# Altium PCB 功率检测模块.PcbDoc
Units mil, origin at the board's own origin, x right, y up, seen from the top; angles counter-clockwise.
Board outline 2830 x 2245 mil, 2 copper layers (Top Layer, Bottom Layer); 41 components, 28 nets, 158 pads, 114 vias.
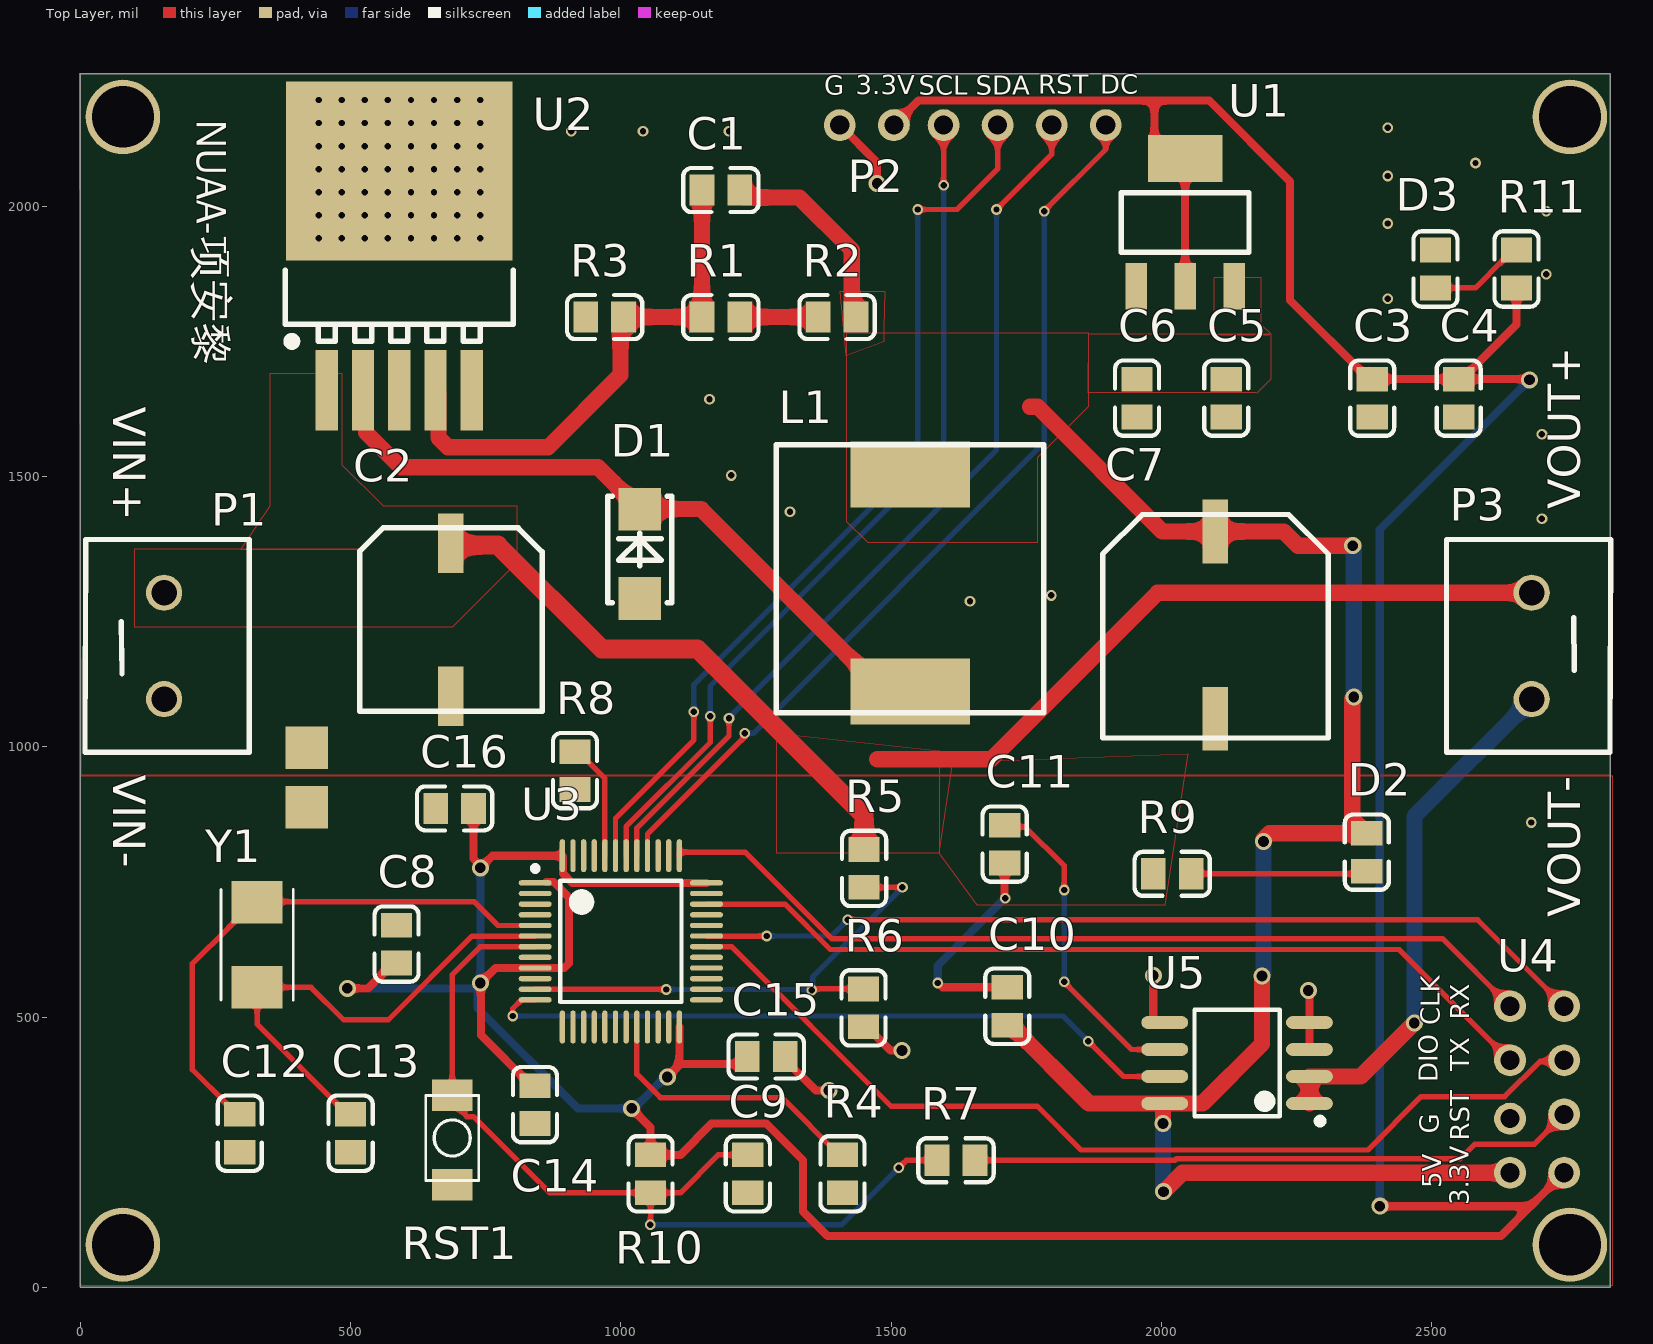
[diagram p0: Top Layer view]
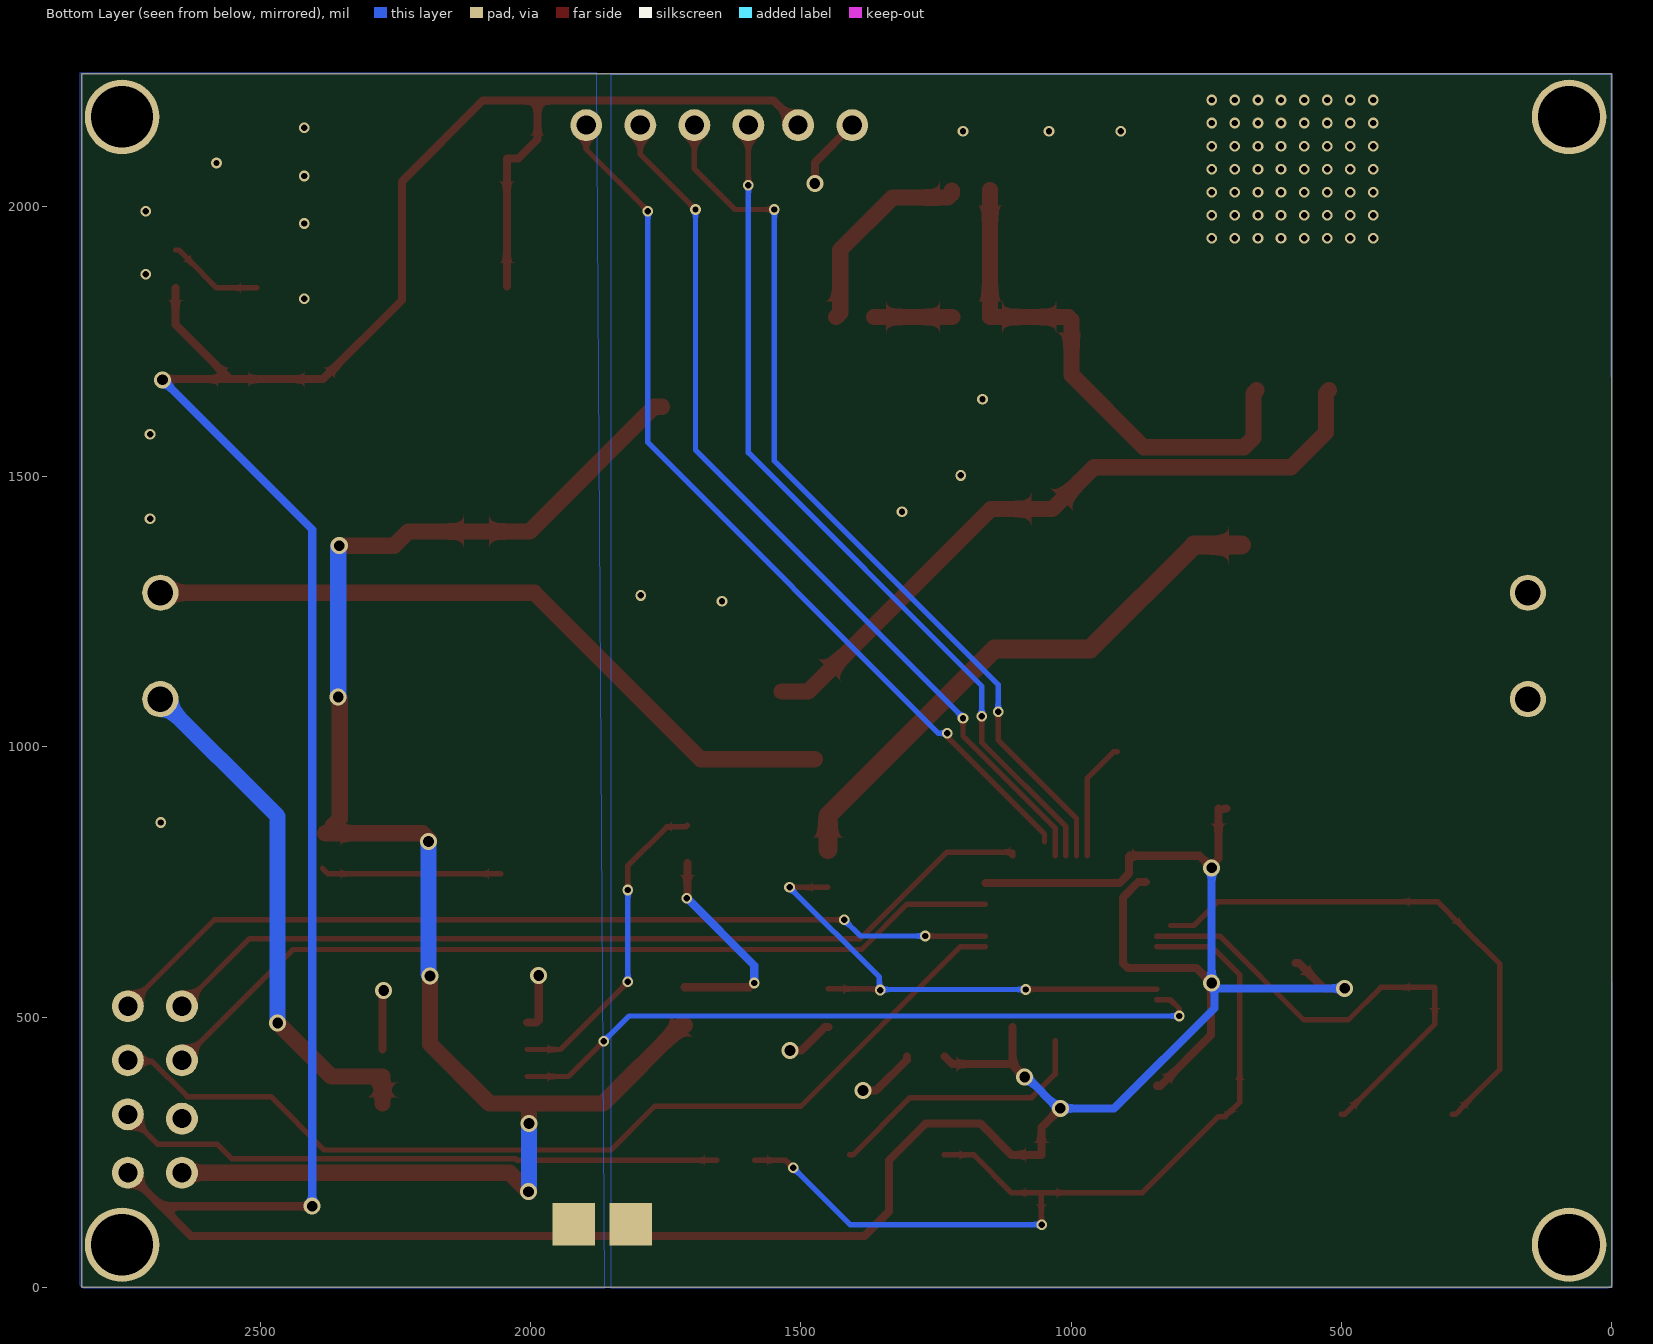
[diagram p1: Bottom Layer view, seen from below]
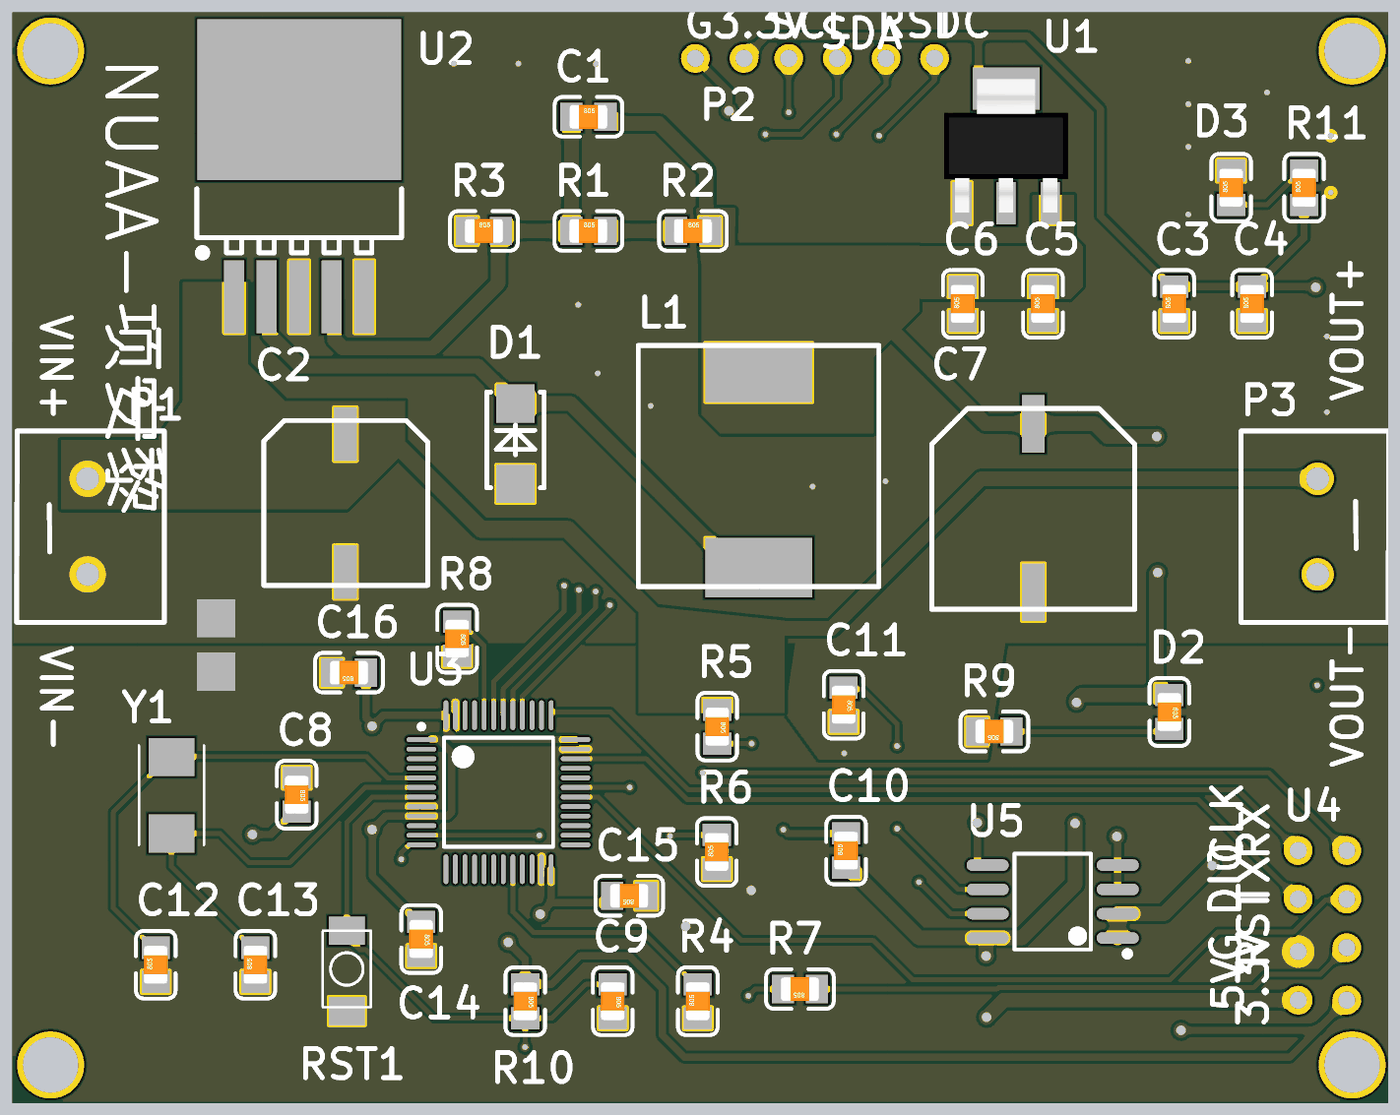
[diagram p2: 3D render of the assembled board from above, using the file's embedded part models]

## Layer stack, top to bottom
Top Solder: solder mask 0.4, Solder Resist, Dk 3.5
Top Layer: signal copper 1.4
Dielectric 1: dielectric 12.6, FR-4, Dk 4.8
Bottom Layer: signal copper 1.4
Bottom Solder: solder mask 0.4, Solder Resist, Dk 3.5

## Board outline
0,0 0,2245 2830,2245 2830,0

## Design rules (kind name [scope] priority, off if disabled: settings)
Clearance [All] p1: gap=6 ignorepadtopadclearanceinfootprint=FALSE except(0: Arc-Hole Track-Hole SMDPad-Hole THPad-Hole Via-Hole Fill-Hole Poly-Hole Region-Hole Text-Hole)
PolygonConnect [All] p1: connectstyle=Direct reliefconductorwidth=10 reliefentries=4 polygonreliefangle="90 Angle" airgapwidth=10
RoutingVias [All] p1: holewidth=28 width=50 viastyle="Through Hole" minholewidth=28 minwidth=50 maxholewidth=28 maxwidth=50
SolderMaskExpansion [All] p1: expansion=4 istentingtop=FALSE
Width [All] p1: maxlimit=35 minlimit=8 preferedwidth=10 minimp=50.000000 maximp=50.000000 favimp=50.000000
30 further rules are at their usual default settings.

## Components (designator, comment, footprint, x,y, rotation, side; value= is the part's Value field where it differs from the comment)
C1 "3.3nF" 0805 1185.04,2030 r0 top
C2 "100uF" 电解电容8*10.5 685,1235 r270 top
C3 "10uF" 0805 2390,1645.04 r90 top
C4 "0.1uF" 0805 2550,1645.04 r90 top
C5 "10uF" 0805 2120,1645.04 r90 top
C6 "0.1uF" 0805 1955,1645.04 r90 top
C7 "220uF" 电解电容10*10.5 2100,1225 r270 top
C8 "0.1uF" 0805 585,635 r270 top
C9 "0.1uF" 0805 1235,209.96 r270 top
C10 "0.1uF" 0805 1715,520 r90 top
C11 "1nF" 0805 1710,820 r270 top
C12 "22pF" 0805 295,285 r90 top
C13 "22pF" 0805 500,285 r90 top
C14 "0.1uF" 0805 841,337.96 r270 top
C15 "0.1uF" 0805 1268.96,427 r180 top
C16 "0.1uF" 0805 692.46,886 r180 top
D1 "1N5822" SMA(DO-214AC)_S2 1035,1365 r270 top
D2 "LED" 0805 2380,805.04 r270 top
D3 "LED" 0805 2507,1883.96 r90 top
L1 "470uH" 电感 1535.43,1311.09 r180 top
P1 "接线端子" 接线端子 155,1186.57 r270 top
P2 "OLED" HDR6 1397.06,2150 r0 top
P3 "接线端子" 接线端子 2685,1186.57 r90 top
R1 "12K" 0805 1185,1795 r0 top
R2 "43K" 0805 1400,1795 r0 top
R3 "18K" 0805 969.96,1795 r0 top
R4 "10K" 0805 1410,209.96 r90 top
R5 "75K" 0805 1450,774.96 r270 top
R6 "7K5" 0805 1449,516.96 r90 top
R7 "1.5K" 0805 1620.04,235 r180 top
R8 "10K" 0805 915,955.96 r270 top
R9 "10K" 0805 2019.96,765 r180 top
R10 "10K" 0805 1055,209.96 r270 top
R11 "3.9K" 0805 2657,1883.96 r90 top
RST1 "按键" SWT3*4 688,276.26 r270 top
U1 "AMS1117_3.3" SOT-223 2044,1970 r270 top
U2 "LM2596S-ADJ" TO-263-5 590,1659.49 r270 top
U3 "STM32F103C8T6" STM-LQFP48_L 1000,640 r0 top
U4 "SWD&USART" HDR2X4 2645,520 r270 top
U5 "ACS712-5A" SOP-8_208mil 2140,415 r90 top
Y1 "晶振" 5032_2P 327.2,633.74 r270 top

## Footprints (in the part's own frame and the unit in brackets; to place one, negate y for a bottom-side part, rotate by r counter-clockwise, add the part's x,y. Pads: shape width x height; smd on the part's side, far side on the other; paste and mask are expansions set on the pad)
0805 [mm]
  rect 1.16x1.47 smd: 1(-0.89,0) 2(0.89,0)
  silkscreen extent -1.77,-1.04 1.77,1.04, body extent -1,-0.62 1,0.63, height 0.77
5032_2P [mm]
  rect 2x2.4 smd: 1(-2,0) 2(2,0)
  silkscreen extent -2.6,-1.7 2.6,1.7
HDR2X4 [mm]
  round 1.5 hole 0.9: 1(0,0) 2(2.54,0) 3(5.282,0) 4(7.822,0) 5(0,2.54) 6(2.54,2.54) 7(5.08,2.54) 8(7.822,2.54)
HDR6 [mm]
  round 1.5 hole 0.9: 1(0.202,0) 2(2.742,0) 3(5.08,0) 4(7.62,0) 5(10.16,0) 6(12.7,0)
SMA(DO-214AC)_S2 [mm]
  rect 2x2 smd: 1(2.302,0) 2(-1.898,0)
  silkscreen extent -2.5,-1.5 2.5,1.5
SOP-8_208mil [mm]
  oval 0.6x2.2 smd: 1(-1.905,-3.4) 2(-0.635,-3.4) 3(0.635,-3.4) 4(1.905,-3.4) 5(1.905,3.4) 6(0.635,3.4) 7(-0.635,3.4) 8(-1.905,3.4)
  silkscreen extent -2.88,-4.05 2.5,2
SOT-223 [mm]
  rect 2.2x1 smd: 1(3,-2.3) 2(3,0) 3(3,2.3)
  rect 2.2x3.5 smd: 2(-3,0)
  silkscreen extent -1.4,-3 1.4,3, body extent -3.49,-3.24 3.49,3.24, height 1.64
STM-LQFP48_L [mm] "QFP, 48-Leads, Body 7x7mm, Pitch 0.5mm, IPC High Density"
  oval 1.55x0.25 smd: 1(-4.025,2.75) 2(-4.025,2.25) 3(-4.025,1.75) 4(-4.025,1.25) 5(-4.025,0.75) 6(-4.025,0.25) 7(-4.025,-0.25) 8(-4.025,-0.75) 9(-4.025,-1.25) 10(-4.025,-1.75) 11(-4.025,-2.25) 12(-4.025,-2.75) 25(4.025,-2.75) 26(4.025,-2.25) 27(4.025,-1.75) 28(4.025,-1.25) 29(4.025,-0.75) 30(4.025,-0.25) 31(4.025,0.25) 32(4.025,0.75) 33(4.025,1.25) 34(4.025,1.75) 35(4.025,2.25) 36(4.025,2.75)
  oval 0.25x1.55 smd: 13(-2.75,-4.025) 14(-2.25,-4.025) 15(-1.75,-4.025) 16(-1.25,-4.025) 17(-0.75,-4.025) 18(-0.25,-4.025) 19(0.25,-4.025) 20(0.75,-4.025) 21(1.25,-4.025) 22(1.75,-4.025) 23(2.25,-4.025) 24(2.75,-4.025) 37(2.75,4.025) 38(2.25,4.025) 39(1.75,4.025) 40(1.25,4.025) 41(0.75,4.025) 42(0.25,4.025) 43(-0.25,4.025) 44(-0.75,4.025) 45(-1.25,4.025) 46(-1.75,4.025) 47(-2.25,4.025) 48(-2.75,4.025)
  silkscreen extent -4.15,-2.85 2.85,3.55, body extent -3.5,-3.5 3.5,3.5, height 1.6
SWT3*4 [mm]
  rect 1.48x1.9 smd: 1(-2,0) 2(2.202,0)
  silkscreen extent -2,-1.25 2,1.25
TO-263-5 [mm]
  rect 8.4x10.65 smd: 0(-10.3,0)
  rect 3.8x1.05 smd: 1(0,-3.4) 2(0,-1.7) 3(0,0) 4(0,1.7) 5(0,3.4)
  silkscreen extent -5.65,-5.35 -2.1,5.35
接线端子 [mm]
  round 1.7 hole 1.2: 1(-2.5,0) 2(2.5,0)
  silkscreen extent -5,-3.72 5,4
电感 [mm]
  rect 5.6x3.1 smd: 1(0,5.302) 2(0,-4.898)
  silkscreen extent -6.28,-6.3 6.3,6.3
电解电容8*10.5 [mm]
  rect 2.8x1.2 smd: 1(-3.6,0) 2(3.6,0)
  silkscreen extent -4.32,-4.26 4.3,4.3
电解电容10*10.5 [mm]
  rect 3x1.2 smd: 1(-4.4,0) 2(4.4,0)
  silkscreen extent -5.2,-5.3 5.3,5.3

## Part data
C1 C3 C4 C5 C6 C8 C9 C10 C11 C12 C13 C14 C15 C16: library part 电容, "电容"
C2 C7: library part 电解电容
L1: library part 电感
P1 P3: "螺旋式接线端子"
R1 R2 R3 R4 R5 R6 R7 R8 R9 R10 R11: library part RES, "贴片电阻"
U3: "ARM Cortex-M3 32-bit MCU, 64 KB Flash, 20 KB Internal RAM, 37 I/Os, 48-pin LQFP, -40 to 85 degC, Tray", I/Os (High Current)=37, Operating Frequency(F) (Processor speed) (MHz)=72, Supplier Part Number 1=497-6063-ND, Supply Voltage(Vcc) min (V)=2, A/D Converter="2x12-bit (10 Channel)", ComponentLink1Description="Manufacturer URL", ComponentLink1URL=http://www.st.com/web/en/home.html, ComponentLink2Description=Datasheet, ComponentLink2URL=http://www.st.com/st-web-ui/static/active/en/resource/technical/document/datasheet/CD00161566.pdf, ComponentLink3Description="Package Specification", ComponentLink3URL=http://www.st.com/st-web-ui/static/active/en/resource/technical/document/datasheet/DM00058181.pdf, Core="ARM Cortex-M3", DatasheetVersion="Rev. 16", FLASH Size (Prog) (kB)=64, Internal RAM Size (kB)=20, Mounting Technology="Surface Mount", PackageDescription="48-Pin Low Profile Quad Flat Package, 7 x 7 mm Body, 0.5 mm Pitch", PackageReference=LQFP48, PackageVersion="Rev. 6, 06/2013", Packing=Tray, PartNumber=STM32F103C8T6, Supplier 1=Digi-Key, Supplier 2=Farnell, Supplier 3=Newark, Supplier 4=Newark, Supplier 5=Mouser, Supplier Part Number 2=1447637, Supplier Part Number 3=59M2182, Supplier Part Number 4=57P1222, Supplier Part Number 5=511-STM32F103C8T6

## Free pads (board coordinates)
  round 137.8 hole 114.17: ""(78.74,78.74) ""(78.74,2165.35) ""(2755.91,78.74) ""(2755.91,2165.35)
  rect 78.74x78.74 smd mask+0: ""(419,888) ""(419,998)
  rect 78.74x78.74 smd far side mask+0: ""(1815,117) ""(1920,117)

## Via types
v1: diameter 19.68, hole 11.81, Top Layer to Bottom Layer, 58 vias
v2: diameter 19.68, hole 11.81, Top Layer to Bottom Layer, tented both sides, 31 vias
v3: diameter 31.5, hole 19.68, Top Layer to Bottom Layer, tented both sides, 19 vias
v4: diameter 19.68/19.68 (per signal layer), hole 11.81, Top Layer to Bottom Layer, tented both sides, 6 vias

## Nets (pads, with @x,y where several pads share a name; then routed paths per layer and width w, separated by ;. In a path a pad name is that pad's centre, name@x,y a point inside that pad or via, vN(x,y) a via of type N, cw(c..) or ccw(c..) an arc to the next point about the centre after c; other vN are vias at no path point)
3.3V: C3.2 C4.2 C8.2 C14.1 C15.2 C16.1 P2.2 R10.1 R11.1 U1.2 U3.1 U3.9 U3.24 U3.36 U3.48 U4.8 | length 8551.2
  Top Layer w15: v3(494,553) 531.94,553 578.9,599.96 C8.2 ; C16.1@712.5,886 726.86,882.98 C16.1@727.5,882.84 ; C16.1 C16.1@727.5,882.84 ; C14.1 834.9,373 741,466.9 741,562 v3(740,563) 767.79,590.79 895.21,590.79 904,599.57 904,721.3 875.79,749.5 U3.1@862.05,749.5 ; v3(1020,331) 1055,296 R10.1 1110,245 1168,303 1269,303 1337,235 1337,140 1382,95 2627.94,95 2682.94,150 ; v3(1086,389) 1108.27,411.27 ; U3.24 1108.27,411.27 ; U3.36 909.97,748.27 893,765.24 893,797.2 U3.48 762.46,798.46 v3(740,776) 740,780.46 727.5,792.96 C16.1@727.5,882.84 ; C15.2 1219.92,413 1110,413 1108.27,411.27 ; P2.2 1550.53,2195.53 1987,2195.53 ; U1.2@2044,1851.89 2044,2088.11 2022.81,2088.11 1987,2123.92 1987,2195.53 ; v3(2404,150) 2682.94,150 ; R11.1 2657,1780.98 C4.2@2556.1,1680.08 ; v3(2681,1679) 2679.92,1680.08 C4.2@2556.1,1680.08 ; U4.8 2682.94,150 ; 1987,2195.53 2088.47,2195.53 2237.94,2046.06 2237.94,1826.04 2383.9,1680.08 C3.2 C4.2 C4.2@2556.1,1680.08
  Bottom Layer w15: v3(494,553) 726.89,553 736.89,563 v3(740,563) ; v3(740,776) v3(740,563) ; v3(1086,389) 1082,389 1024,331 v3(1020,331) 920.36,331 735,516.36 735,546.34 736.84,548.18 736.84,559.84 v3(740,563) ; v3(2404,150) 2404,1402 v3(2681,1679)
+5: C1.2 C5.2 C6.2 C7.1 C10.1 D2.1 L1.2 R2.2 U1.3 U4.4 U5.8 | length 3599.9
  Top Layer w10: C1.2 C1.2@1220.82,2029.26
  Top Layer w30: C1.2@1220.82,2029.26 1220.82,2023.15 1227.91,2016.06 1330.39,2016.06 1427.2,1919.25 1427.2,1802.83 R2.2 ; C10.1 1721.1,484.96 1866.06,340 U5.8 ; 1757,1629 1771,1629 2001.77,1398.23 C7.1 2226.43,1398.23 2252.66,1372 v3(2354,1372) ; v3(2003,303) 2003,336.86 U5.8 ; v3(2004,177) 2039.06,212.06 U4.4 ; v3(2186,576) 2186,450 2076,340 U5.8 ; v3@2188,828 2200.08,840.08 D2.1@2373.9,840.08 ; v3(2356,1092) 2353,1089 2353,867.08 2366.06,854.02 2366.06,847.91 D2.1@2373.9,840.08 ; D2.1 D2.1@2373.9,840.08
  Bottom Layer w30: v3(2003,303) 2003,178.4 2004,177.4 v3(2004,177) ; v3(2186,576) 2186,576.4 2188.97,579.37 v3(2188.97,824.7) ; v3(2354,1372) 2354,1371.6 2356,1369.6 v3(2356,1092)
ADC1_IN1: R5.2 R6.2 U3.11 | length 940.2
  Top Layer w10: U3.11 1083.58,551.42 v2(1084,551) ; v2(1353,549.92) 1355.08,552 R6.2 ; R5.2 v2(1520.92,739.92) v2@1521,740
  Bottom Layer w10: v2(1084,551) v2@1354.08,551 ; v2(1353,549.92) v2@1354.08,551 ; v2(1520.92,739.92) 1354.85,573.85 1354.85,551.77 v2@1354.08,551
ADC2_IN2: U3.12 U5.7 | length 1314.4
  Top Layer w10: v4(800,502) 800,515.63 816.1,531.73 U3.12 ; v4(1865,455) 1930,390 U5.7
  Bottom Layer w10: v4(800,502) 1818,502 v4(1865,455)
BOOT1: R4.2 U3.20 | length 504
  Top Layer w10: U3.20@1029.45,456.02 1029.45,394.55 1073,351 1297.9,351 1403.9,245 R4.2
GND: C8.1 C9.2 C12.1 C13.1 C14.2 C15.1 C16.2 P2.1 pad.@419,888 pad.@1815,117 R4.1 R6.1 R8.2 RST1.2 U3.8 U3.23 U3.35 U3.47 U4.3 | length 336.4
  Top Layer w15: C15.1 1304,420.9 1360.9,364 v3(1385,364) ; P2.1 1474,2081 v3(1474,2042) ; R6.1 1455.1,481.92 1499.02,438 v3(1520,438)
GND-A: C2.2 C3.1 C4.1 C5.1 C6.1 C7.2 C10.2 C11.2 D1.1 D3.2 P1.2 pad.@419,998 pad.@1920,117 R3.1 R9.2 U1.1 U2.3 U2.5 U5.3 U5.4 U5.5 | length 622
  Top Layer w15: v2(1586,563) 1587.27,563 1595.23,555.04 C10.2 ; C11.2 1710,721 v2(1711,720) ; v3(1985,577) 1985,493.98 1988.98,490 U5.5 ; v3(2272,549) 2273.86,547.14 U5.4 U5.3
  Bottom Layer w15: v2(1586,563) 1586.34,563.34 1586.34,595.34 v2(1711,720)
  other v1: 2712,1874 2712,1991
  other v2: 2684,860 1646,1269 1796,1280 2704,1422 1313,1435 1204,1502 2704,1578 1164,1643 2419,1829 2419,1968 2419,2056 2581,2080.04 908,2139 1041,2139 1200,2138.53 2419,2145
NetC1_1: C1.1 R1.1 R3.2 U2.4 | length 979.1
  Top Layer w30: U2.4 662.6,1653.82 662.6,1571.57 680.17,1554 865.37,1554 999.33,1687.96 999.33,1789.33 R3.2 R1.1 ; R1.1 C1.1
NetC11_1: C11.1 U5.6 | length 594
  Top Layer w10: C11.1 1713.12,851.92 1748.08,851.92 1820,780 v4(1820,735) ; v4(1820,565) 1945,440 U5.6
  Bottom Layer w10: v4(1820,565) v4(1820,735)
NetC12_2: C12.2 U3.5 Y1.1 | length 992.9
  Top Layer w10: C12.2 288.9,320.04 271.06,337.87 271.06,338.85 207.42,402.49 207.42,598.69 274.81,666.09 322.18,713.45 328.18,713.45 728.42,713.45 772.42,669.45 U3.5@816.02,669.45
NetC13_2: C13.2 U3.6 Y1.2 | length 913.4
  Top Layer w10: C13.2 493.9,320.04 367,446.94 367,447 327.2,486.8 Y1.2 427,555 487,495 570,495 724.84,649.84 U3.6
NetD1_2: D1.2 L1.1 U2.2 | length 1285.6
  Top Layer w30: U2.2 528.74,1653.82 528.74,1581.26 593,1517 957.74,1517 D1.2 1148.84,1439.74 1486.22,1102.36 L1.1
NetD2_2: D2.2 R9.1 | length 334.1
  Top Layer w10: R9.1 2375,765 D2.2@2385,775
NetD3_1: D3.1 R11.2 | length 179.1
  Top Layer w10: D3.1 2507.08,1849 2581,1849 2633.06,1901.06 2633.06,1901.17 2650.9,1919 R11.2
NetR1_2: R1.2 R2.1 | length 144.9
  Top Layer w30: R1.2 R2.1
NetR7_1: R7.1 U4.7 | length 1125.1
  Top Layer w10: R7.1 2025.23,235 2028.29,238.06 2553.06,238.06 2580,265 2690,265 U4.7
NetR8_1: R8.1 U3.44 | length 219.1
  Top Layer w10: R8.1 921.1,991 970.47,941.63 U3.44
OLED_DC: P2.6 U3.40 | length 1686.6
  Top Layer w10: U3.40@1049.29,823.98 1049.29,838.29 1227.15,1016.15 1227.15,1023.15 v2(1229,1025) ; v2(1783,1991) 1897.06,2105.06 P2.6
  Bottom Layer w10: v2(1229,1025) 1245,1025 1783,1563 v2(1783,1991)
OLED_RST: P2.5 U3.41 | length 1669.5
  Top Layer w10: U3.41 1029.53,849.42 1200,1019.89 v2(1200,1053) ; v2(1695,1994) 1797.06,2096.06 P2.5
  Bottom Layer w10: v2(1200,1053) 1200,1054 1695,1549 v2(1695,1994)
OLED_SCL: P2.3 U3.42 | length 1594.8
  Top Layer w10: U3.42 1009.84,852.36 1165.35,1007.87 v2(1165.35,1056.46) ; v2(1597.06,2039.06) P2.3
  Bottom Layer w10: v2(1165.35,1056.46) 1165.35,1112.35 1597.06,1544.06 v2(1597.06,2039.06)
OLED_SDA: P2.4 U3.43 | length 1687.1
  Top Layer w10: U3.43 990.16,867.7 1135,1012.54 v2(1135,1065) ; v2(1549,1994) 1622,1994 1697.06,2069.06 P2.4
  Bottom Layer w10: v2(1135,1065) 1135,1115 1549,1529 v2(1549,1994)
RST: C9.1 R7.2 R10.2 RST1.1 U3.7 | length 1693.5
  Top Layer w10: U3.7 740.16,630.16 688,578 RST1.1 688,342.74 715.13,315.61 727.39,315.61 868,175 R10.2@1055,175 ; v2@1054,115 1055,116 R10.2 1109.92,174.92 1180,245 C9.1 ; v2(1514,221) 1528,235 R7.2
  Bottom Layer w10: v2@1057,116 1409,116 v2(1514,221)
  other v2: 1054.5,115.5
SWCLK_PA14: U3.37 U4.1 | length 1661.3
  Top Layer w10: U3.37 1108.27,804.92 1108.35,805 1230,805 1390,645 2520,645 U4.1
SWDIO_PA13: U3.34 U4.2 | length 1606.2
  Top Layer w10: U3.34 1303.47,708.9 1387.37,625 2440,625 U4.2
USART1-RX: U3.31 U4.5 | length 1665.3
  Top Layer w10: U3.31 1269.84,649.84 v4(1270,650) ; v4(1420,680) 2585,680 U4.5
  Bottom Layer w10: v4(1270,650) 1390,650 v4(1420,680)
USART1-TX: U3.30 U4.6 | length 1811.1
  Top Layer w10: U3.30 1204.84,630.16 1500,335 1770.5,335 1851.44,254.06 2381.93,254.06 2480.45,352.59 2634.91,352.59 2700.47,418.16 2743.16,418.16 U4.6
VIN+: C2.1 P1.1 P3.2 R5.1 U2.1 | length 2373.3
  Top Layer w30: 1474.32,977 1685,977 1993,1285 P3.2
  Top Layer w35: C2.1@685,1373 772.67,1373 964.57,1181.1 1141.73,1181.1 1450,872.83 R5.1
VOUT-: P3.1 U5.1 U5.2 | length 974.2
  Top Layer w30: U5.1 U5.2 2369,390 v3(2468,489)
  Bottom Layer w30: v3(2468,489) 2468,871.15 P3.1
pads on no net: U2.0 U3.2 U3.3 U3.4 U3.10 U3.13 U3.14 U3.15 U3.16 U3.17 U3.18 U3.19 U3.21 U3.22 U3.25 U3.26 U3.27 U3.28 U3.29 U3.32 U3.33 U3.38 U3.39 U3.45 U3.46
copper on no net:
  other v1: 441,1940.67 483.67,1940.67 526.33,1940.67 569,1940.67 611.67,1940.67 654.33,1940.67 697,1940.67 739.67,1940.67 441,1983.33 483.67,1983.33 526.33,1983.33 569,1983.33 611.67,1983.33 654.33,1983.33 697,1983.33 739.67,1983.33 441,2026 483.67,2026 526.33,2026 569,2026 611.67,2026 654.33,2026 697,2026 739.67,2026 441,2068.67 483.67,2068.67 526.33,2068.67 569,2068.67 611.67,2068.67 654.33,2068.67 697,2068.67 739.67,2068.67 441,2111.33 483.67,2111.33 526.33,2111.33 569,2111.33 611.67,2111.33 654.33,2111.33 697,2111.33 739.67,2111.33 441,2154 483.67,2154 526.33,2154 569,2154 611.67,2154 654.33,2154 697,2154 739.67,2154 441,2196.67 483.67,2196.67 526.33,2196.67 569,2196.67 611.67,2196.67 654.33,2196.67 697,2196.67 739.67,2196.67

## Polygon pours and split planes (outlines as drawn)
GND-A on Top Layer "NONET_L01_P026" (solid, shelved, pour order 26): -1,2246 2830,2246 2830,947 1.76,947
GND on Top Layer "NONET_L01_P028" (solid, shelved, pour order 28): 1,946.17 2834,946.17 2834,3 4,3 1,6
GND-A on Top Layer "NONET_L01_P027" (solid, shelved, pour order 27): 2049,987 2006,707 1659,707 1589,803 1614.04,971.59
+5 on Top Layer "NONET_L01_P023" (solid, shelved, pour order 23): 1406,1843 1488,1843 1486,1774 1486,1757 1486,1749 1417,1723
+5 on Top Layer "NONET_L01_P020" (solid, shelved, pour order 20): 2098,1868 2099,1869 2184,1869 2184,1782 2202,1764 2199,1761 2098,1761
+5 on Top Layer "NONET_L01_P019" (solid, shelved, pour order 19): 1866,1765 1867,1764 2202,1764 2202,1680 2176,1654 2175,1655 1865,1655
VIN+ on Top Layer "NONET_L01_P003" (solid, shelved, pour order 3): 1288,1025 1589,993 1589,803 1288,803
VIN+ on Top Layer "NONET_L01_P000" (solid, shelved, pour order 0): 100,1365 100,1222 689,1222 808,1341 808,1445 561,1445 485,1521 485,1690 350,1690 350,1445 297,1365 515,1365 120,1365 110,1365
+5 on Top Layer "NONET_L01_P002" (solid, shelved, pour order 2): 1417.32,1765 1417.32,1417.32 1456.69,1377.95 1771.65,1377.95 1771.65,1535.43 1866,1629.78 1866,1765
GND on Bottom Layer "NONET_L02_P031" (solid, shelved, pour order 31): 1,2243 1852,2243 1852,-1 6,-1 -1,6
GND-A on Bottom Layer "NONET_L02_P030" (solid, shelved, pour order 30): 1877.59,2246 2834,2246 2834,5 2828,-1 1862.59,-1
GND on Bottom Layer "NONET_L02_P029" (solid, shelved, pour order 29): 1,2243

## Silkscreen, mask and mechanical layers (free items; w line width, h text height)
Top Overlay:
  text "RST" at 1772,2195.67 h60
  text "DC" at 1887,2195.67 h60
  text "G" at 1376,2194.67 h60
  text "3.3V" at 1435,2195.17 h60
  text "SCL" at 1551,2194.67 h60
  text "SDA" at 1657,2194 h60
  text "NUAA-项安黎" at 195.69,2160 h100 r270
  text "VIN+" at 61,1629 h60 r270
  text "VOUT+" at 2775,1439 h60 r90
  text "VIN-" at 61,948 h60 r270
  text "VOUT-" at 2775,685 h60 r90
  text "RX" at 2582,495 h60 r90
  text "CLK" at 2527.33,485 h60 r90
  text "TX" at 2582,400 h60 r90
  text "DIO" at 2523.33,379 h60 r90
  text "G" at 2525.33,284 h60 r90
  text "RST" at 2581.33,271 h60 r90
  text "5V" at 2529.33,183 h60 r90
  text "3.3V" at 2580.83,152 h60 r90
Mechanical 13:
  lines w10: 0,0 0,2244.09 2834.65,2244.09 2834.65,0 0,0

## Dimensions
0,2244.09 to 0,0 on Mechanical 13
0,0 to 2834.65,0 on Mechanical 13